# EAGLE board resourciboard - pager (EAGLE 9.6.2)
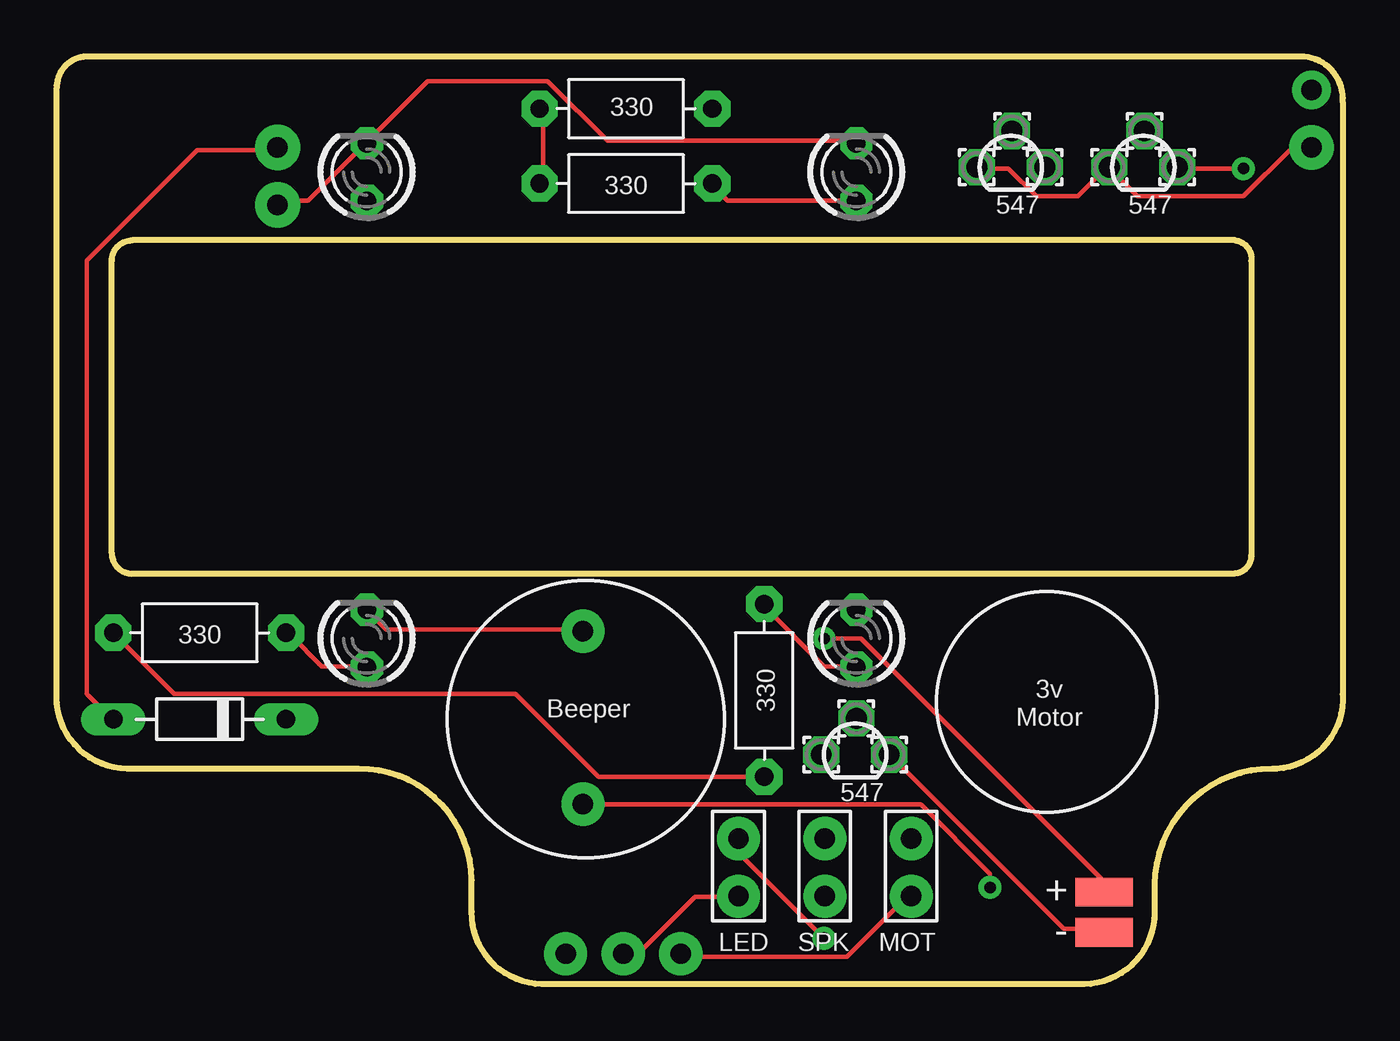
[diagram p0: board, top side]
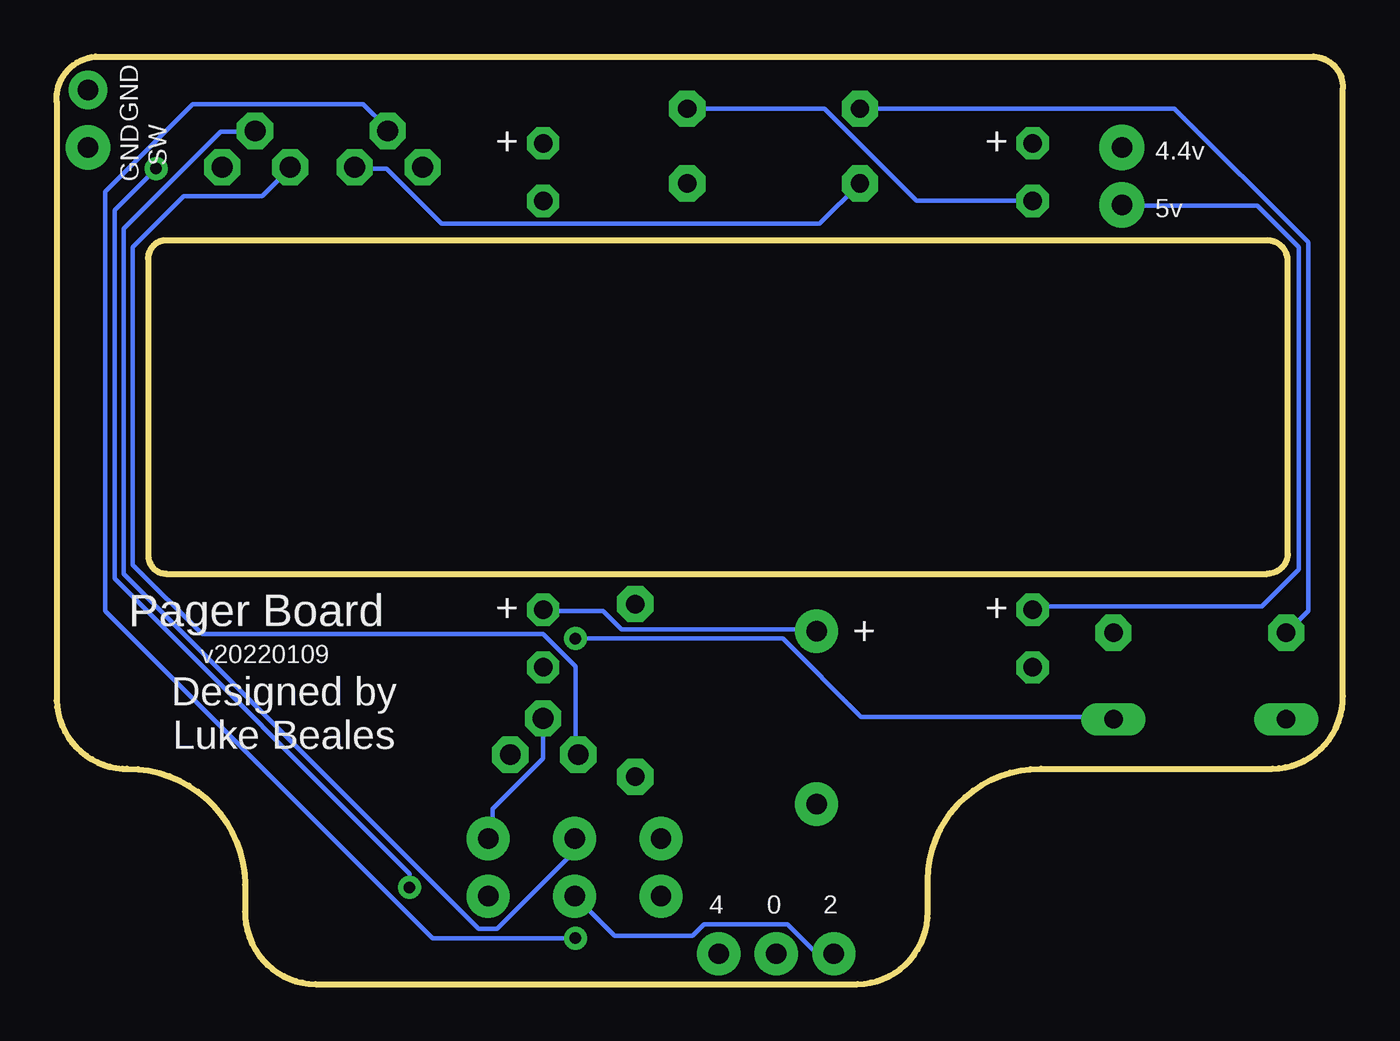
[diagram p1: board, bottom side, seen from below]

Size 56.71 x 40.9 mm. Coordinates in mm from the lower left corner, seen from the top.
Outline: 56.7,38.9 56.7,12.8 arc-90 53.8,9.5 53.6,9.5 arc90 48.4,4.4 48.4,3.2 arc-90 45.3,0 21.4,0 arc-90 18.3,3.2 18.3,4.6 arc90 13.3,9.5 3.1,9.5 arc-90 0,12.7 0,39.5 arc-90 1.3,40.9 55,40.9 arc-90 56.7,38.9
Outline: 51.97,32.8 arc-90 52.67,31.9 52.67,18.9 arc-90 51.87,18.1 3.33,18.1 arc-90 2.43,19 2.43,31.9 arc-90 3.33,32.8 51.97,32.8
Copper layers (1*16): Top 0.035mm / dielectric 1.5mm / Bottom 0.035mm
Design rules "SparkFun": minimum track width 8mil, minimum drill 20mil, track to track 8mil, track to pad 8mil, pad to pad 8mil, via to via 8mil, smd to smd 8mil, copper to edge 10mil, drill to drill 8mil, minimum pad ring 12mil, minimum via ring 10mil, stop-mask expansion 4mil, vias tented up to drill 25mil, thermal gap 10mil

## Footprints (pad centres in the part's own frame; a part is rotated, then mirrored left to right if it is on the bottom)
1,6/0,9 = drill 0.914 pad 1.6 octagon: 1 0,0
LED3MM = drill 0.813 octagon: A -1.27,0; K 1.27,0
R-7,5 = drill 0.813 pad 1.6 octagon: 1 -3.81,0; 2 3.81,0
SMD1,27-2,54 = smd 1.27 x 2.54: 1 0,0
D-7.5 = drill 0.813 long: A 3.81,0; C -3.81,0

## Placement (x,y rotation side)
0  [1,6/0,9]  35.26,11.72 90 top  (not fitted)
2  [1,6/0,9]  42.12,37.63 90 top  (not fitted)
4  [1,6/0,9]  47.96,37.63 90 top  (not fitted)
E$1  [LED3MM]  13.67,15.24 90 top
E$2  [1,6/0,9]  40.57,36.03 90 top  (not fitted)
E$3  [1,6/0,9]  46.41,36.03 90 top  (not fitted)
E$5  [R-7,5]  25.1,38.61 0 top
E$6  [SMD1,27-2,54]  46.18,4.06 90 top
E$8  [LED3MM]  35.26,15.24 90 top
E$9  [R-7,5]  25.1,35.31 0 top
E$10  [LED3MM]  13.67,35.81 90 top
E$11  [LED3MM]  35.26,35.81 90 top
E$12  [R-7,5]  6.3,15.49 0 top
E$15  [R-7,5]  31.2,12.95 90 top
E$17  [SMD1,27-2,54]  46.18,2.29 90 top
E$46  [D-7.5]  6.3,11.68 180 top
E$54  [1,6/0,9]  33.71,10.12 90 top  (not fitted)
GND  [1,6/0,9]  36.71,10.12 90 top  (not fitted)
GND1  [1,6/0,9]  43.57,36.03 90 top  (not fitted)
GND2  [1,6/0,9]  49.41,36.03 90 top  (not fitted)

## Library data of the parts
0 2 4 E$2 E$3 E$6 E$17 E$54 GND GND1 GND2 = wirepad
E$1 E$8 E$10 E$11 = led
E$5 E$9 E$12 E$15 = discrete
E$46 = diode

## Nets
3.8V: E$6.1 E$46.C
4.4V: E$46.A
5V: E$1.K E$8.K E$10.K E$11.K
BEEP_SIGNAL: 4.1
BUZZ_GND: GND2.1
GND_SW: E$2.1 E$3.1 E$54.1
LED_SIGNAL: 2.1
MOTOR_SIGNAL: 0.1
S$4: E$5.1 E$9.1 E$12.1 E$15.1 GND1.1
S$7: E$1.A E$12.2
S$8: E$5.2 E$10.A
S$11: E$17.1 GND.1
S$12: E$9.2 E$11.A
S$14: E$8.A E$15.2

## Tracks (layer width: path | path; a pad name or v marks a point on that pad's centre or on a via)
0  (via drill 0.9 pad 1.91)
  Top 0.203: v24.98,1.34 25.1,1.42 25.71,1.42 28.15,3.86 29.98,3.86 v30.06,3.88
2  (via drill 0.9 pad 1.91)
  Bottom 0.203: v22.44,1.34 22.46,1.42 23.27,1.42 24.49,2.64 28.17,2.64 28.67,2.14 32.12,2.14 33.84,3.86 v33.87,3.88
3.8V  (via drill 0.51)
  Top 0.203: v33.84,15.24 35.46,15.24 46.03,4.67 46.03,4.06 E$6.1
  Bottom 0.203: v33.84,15.24 24.69,15.24 21.24,11.79 10.27,11.79 E$46.C
4  (via drill 0.9 pad 1.91)
  Top 0.203: v27.52,1.34 27.54,1.22 34.85,1.22 37.5,3.86 v37.68,3.88
4.4V  (via drill 0.9 pad 2)
  Top 0.203: v9.74,36.9 9.66,36.78 6.2,36.78 1.33,31.9 1.33,12.8 2.34,11.79 E$46.A
5V  (via drill 0.9 pad 1.91, 0.9 pad 2)
  Top 0.203: E$1.K 14.53,15.65 23.07,15.65 v23.2,15.56 | v9.74,34.36 9.86,34.54 11.08,34.54 13.52,36.98 E$10.K 13.72,37.19 16.36,39.83 21.65,39.83 24.29,37.19 35.26,37.19 E$11.K
  Bottom 0.203: E$8.K 35.26,16.46 32.62,16.46 31.81,15.65 23.27,15.65 v23.2,15.56 | E$1.K 13.52,16.66 3.56,16.66 1.93,18.29 1.93,32.51 3.76,34.34 9.66,34.34 v9.74,34.36
BEEP_SIGNAL  (via drill 0.9 pad 1.91)
  Bottom 0.203: v33.87,6.42 34.04,6.3 34.04,5.69 37.29,2.44 38.11,2.44 53.75,18.09 53.75,33.33 49.48,37.59 48.06,37.59 4.1
BUZZ_GND  (via drill 0.51, 0.9 pad 1.91)
  Top 0.203: v41.15,4.27 41.15,4.88 38.11,7.92 23.27,7.92 v23.2,7.94 | v52.33,35.97 49.48,35.97 GND2.1
  Bottom 0.203: v41.15,4.27 41.15,4.88 54.16,17.88 54.16,34.14 v52.33,35.97
GND  (via drill 0.9 pad 1.7)
  other vias: 55.33,39.44
GND_SW  (via drill 0.9 pad 1.96)
  Top 0.203: v55.33,36.9 55.17,36.78 54.36,36.78 52.33,34.75 47.66,34.75 46.44,35.97 E$3.1 46.23,35.97 45.01,34.75 43.19,34.75 41.97,35.97 40.75,35.97 E$2.1
  Bottom 0.203: E$54.1 33.84,10.16 33.84,14.02 35.26,15.44 50.3,15.44 53.35,18.49 53.35,32.51 51.11,34.75 47.66,34.75 46.44,35.97 E$3.1
LED_SIGNAL  (via drill 0.51, 0.9 pad 1.91)
  Top 0.203: v33.84,2.03 30.18,5.69 30.18,6.3 v30.06,6.42
  Bottom 0.203: v33.84,2.03 40.14,2.03 54.56,16.46 54.56,34.95 50.7,38.81 43.19,38.81 42.17,37.8 2.1
MOTOR_SIGNAL  (via drill 0.9 pad 1.91)
  Bottom 0.203: 0.1 35.26,9.96 37.5,7.72 37.5,6.5 v37.68,6.42
S$4
  Top 0.203: E$9.1 21.44,35.36 21.44,38.61 E$5.1 | E$15.1 23.88,9.14 20.22,12.8 5.19,12.8 E$12.1
  Bottom 0.203: E$9.1 23.07,33.53 39.73,33.53 42.17,35.97 43.39,35.97 GND1.1 | E$5.1 7.42,38.61 1.53,32.72 1.53,16.46 E$12.1
S$7
  Top 0.203: E$1.A 13.52,14.02 11.69,14.02 10.27,15.44 E$12.2
S$8
  Bottom 0.203: E$10.A 18.8,34.54 22.86,38.61 E$5.2
S$11
  Top 0.203: E$17.1 46.03,2.44 44.4,2.44 36.89,9.96 GND.1
S$12
  Top 0.203: E$11.A 29.57,34.54 28.96,35.15 E$9.2
S$14
  Top 0.203: E$8.A 35.26,14.02 33.84,14.02 31.2,16.66 E$15.2

## Text on the board
tPlace: 330 | 330 | 547 | 547 | 330 | Beeper | 330 | 3v / Motor | 547 | + | - | LED | SPK | MOT
bPlace: GND | + | + | GND / SW | 4.4v | 5v | + | + | + | Pager Board | v20220109 | Designed by / Luke Beales | 2 | 0 | 4